# Altium PCB plp-cm_2a_assm.PcbDoc
Units mm, origin at the board's own origin, x right, y up, seen from the top; angles counter-clockwise.
Board outline 34 x 22 mm, 4 copper layers (Top Layer, Signal Layer 1, Signal Layer 2, Bottom Layer), stack 1.026 mm thick; 58 components, 45 nets, 205 pads, 63 vias.
Unrouted connection lines stored in the file: 34.
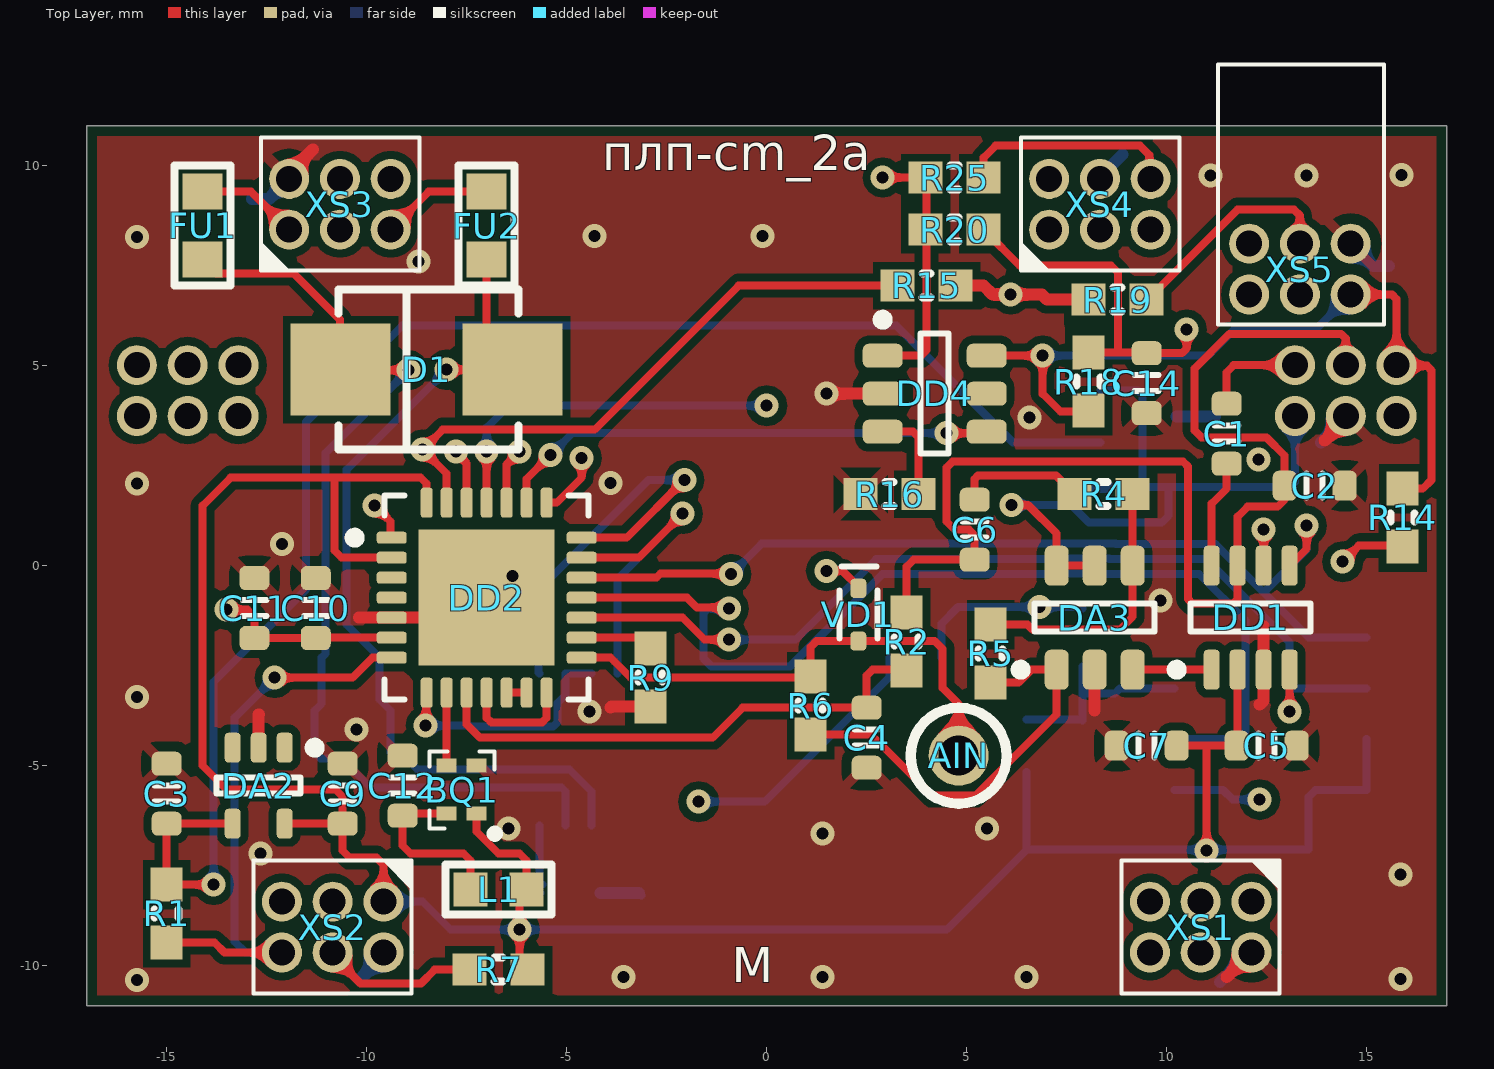
[diagram p0: Top Layer view]
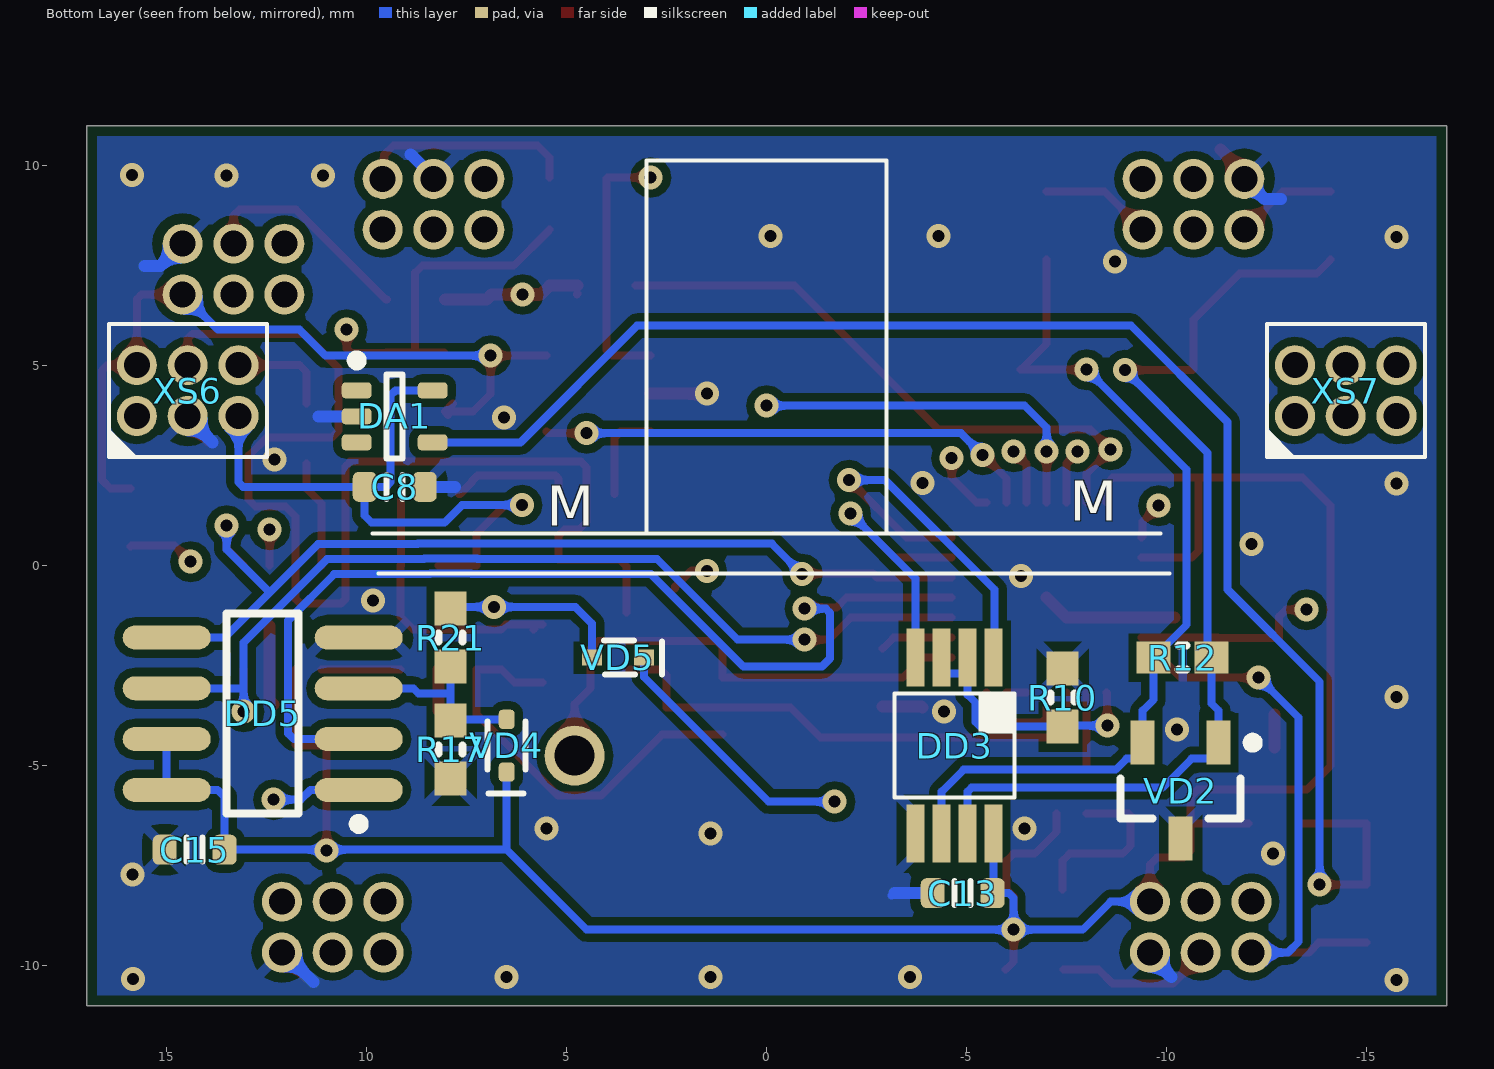
[diagram p1: Bottom Layer view, seen from below]
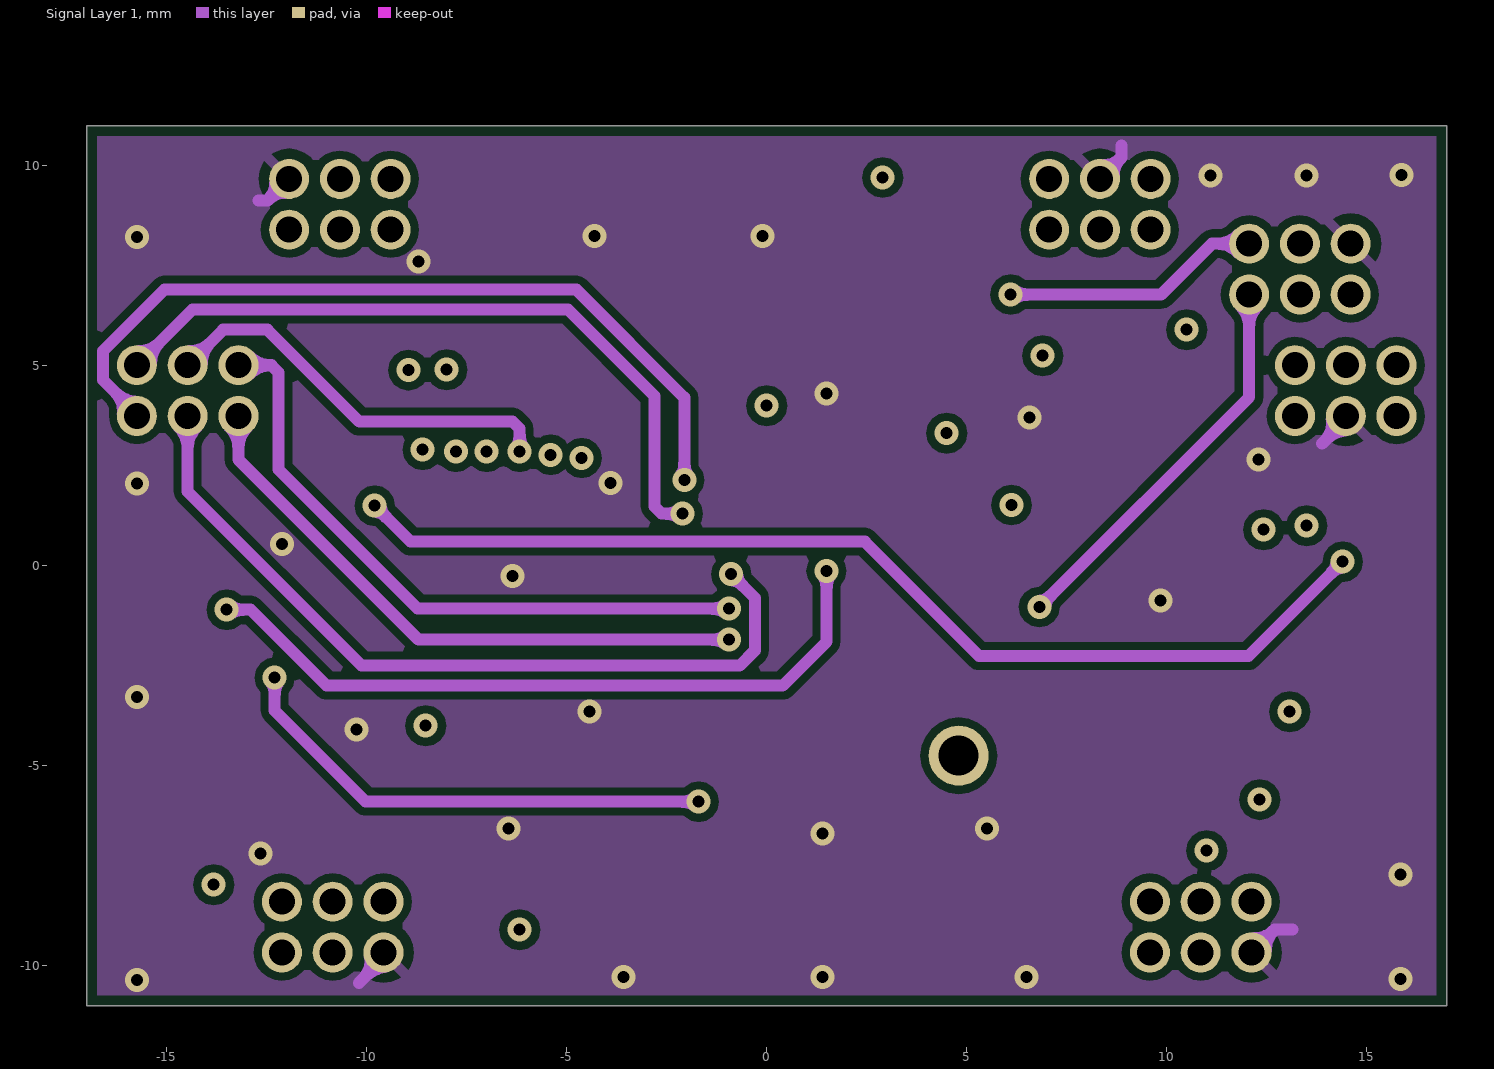
[diagram p2: Signal Layer 1]
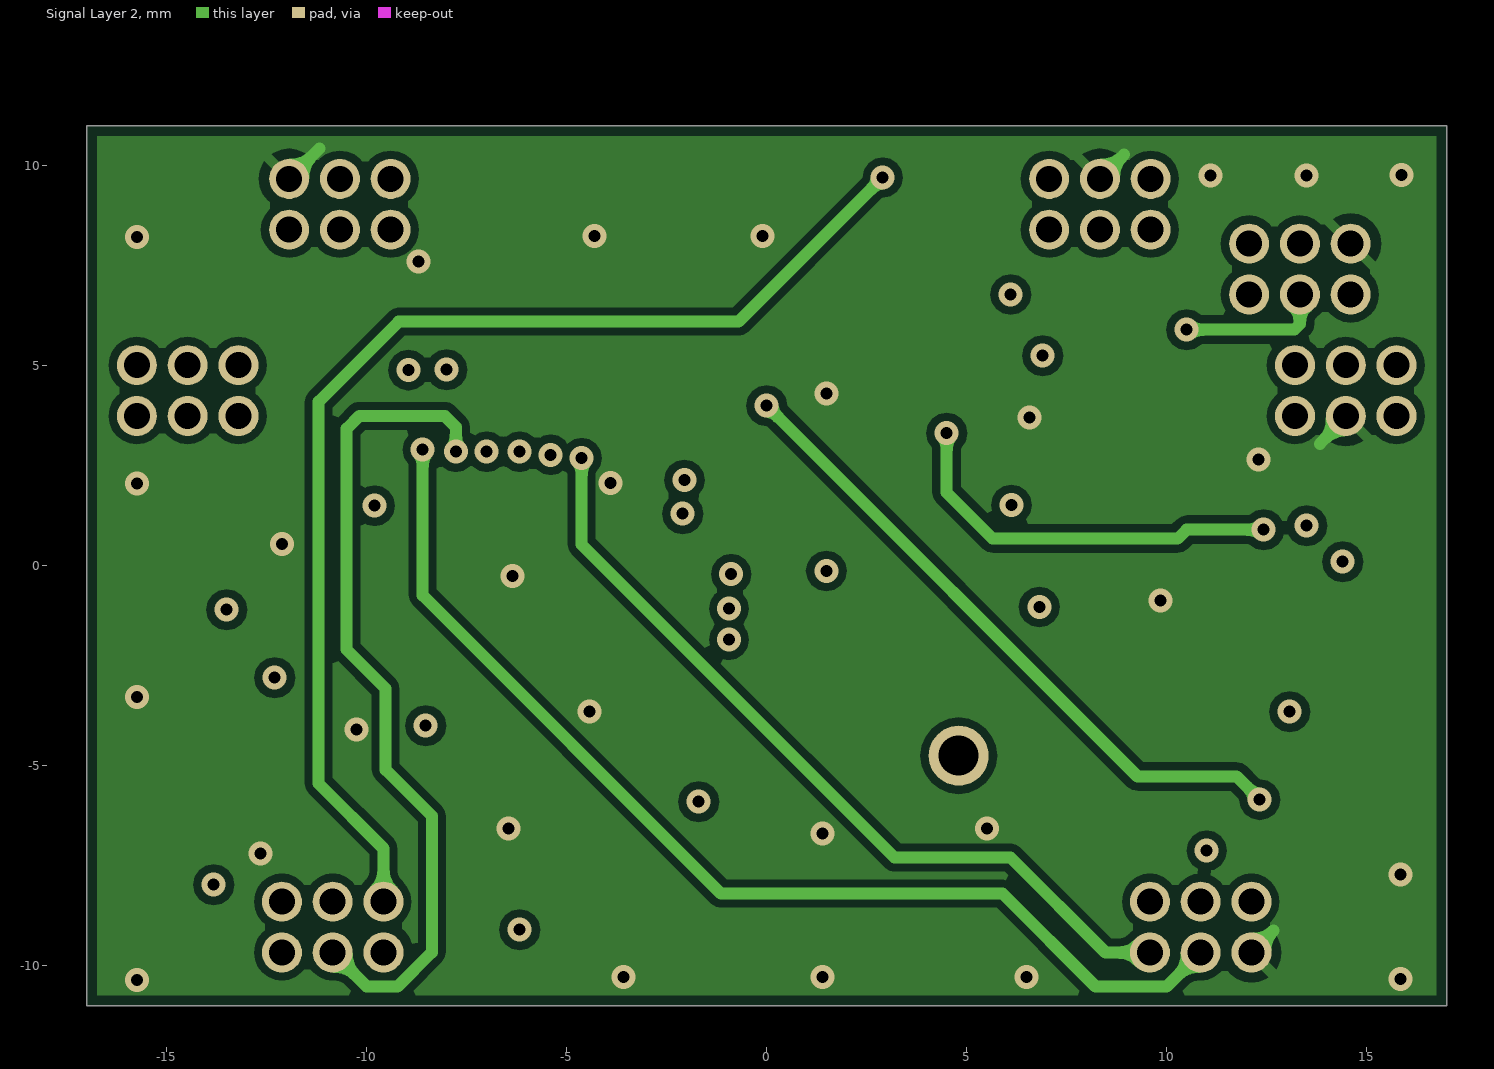
[diagram p3: Signal Layer 2]
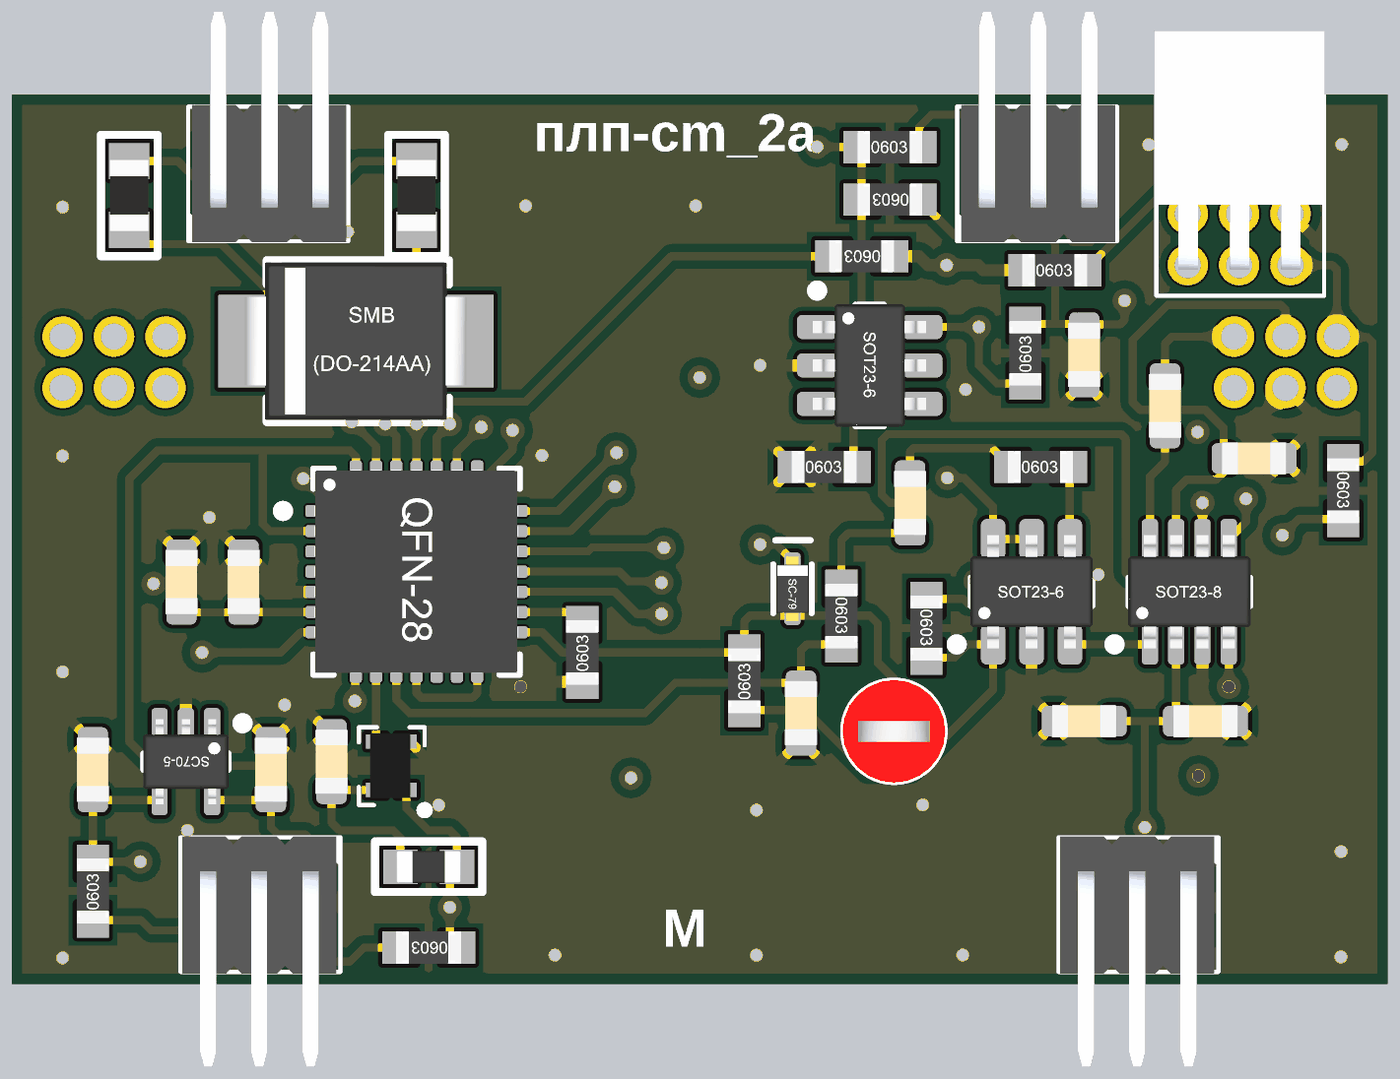
[diagram p4: 3D render of the assembled board from above, using the file's embedded part models]
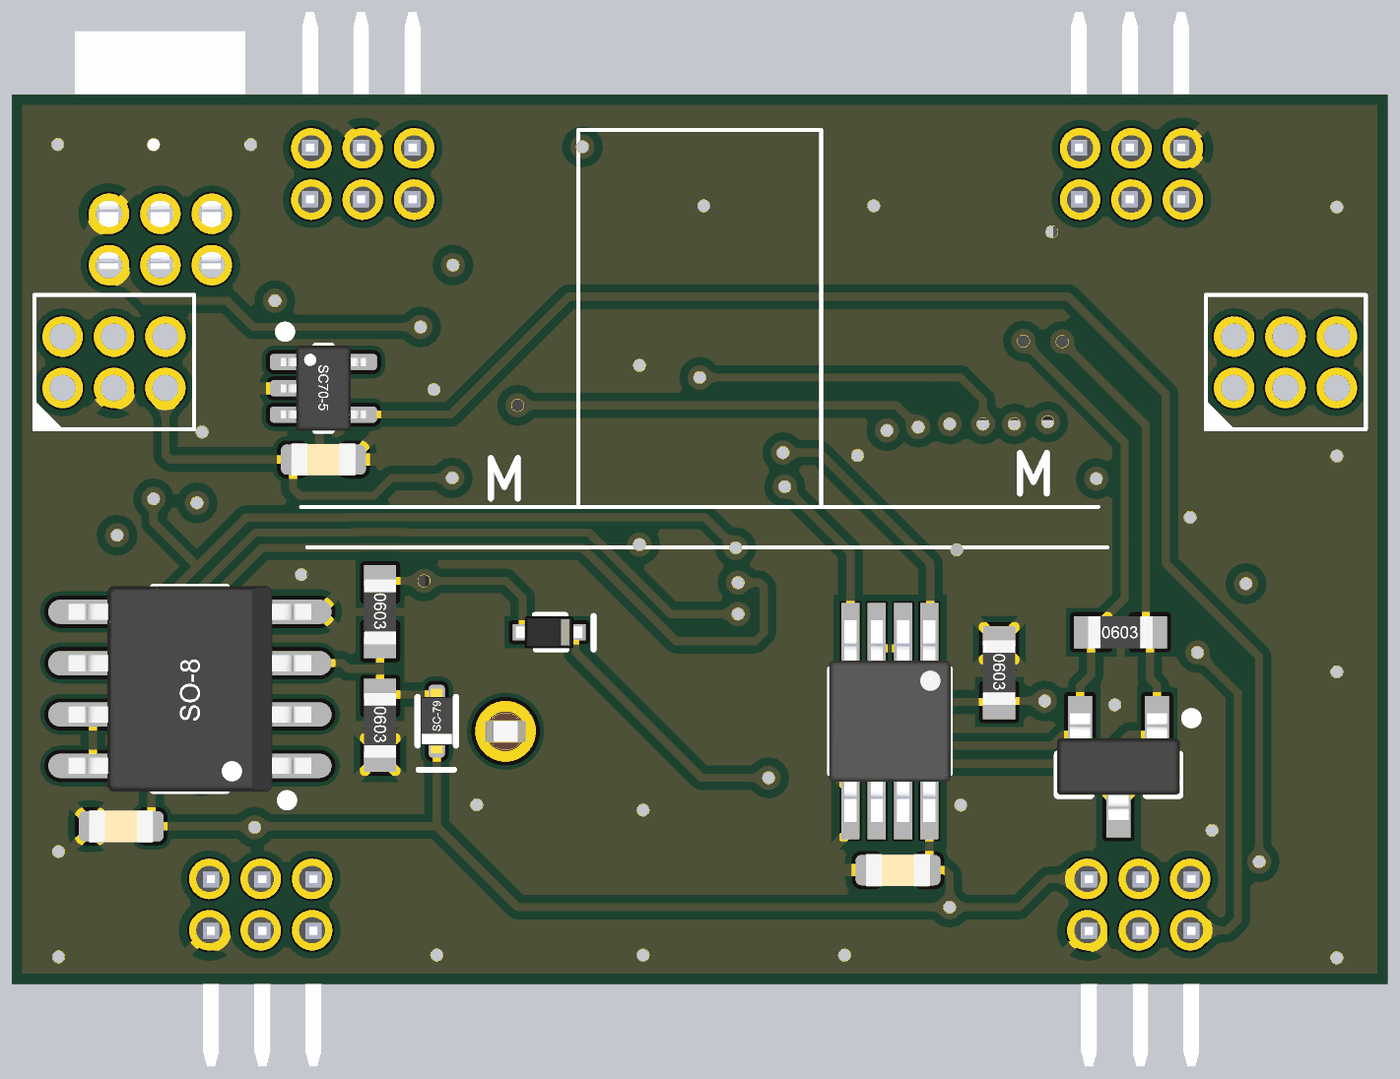
[diagram p5: 3D render of the assembled board from below, using the file's embedded part models]

## Layer stack, top to bottom
Top Solder: solder mask 0.0102, Solder Resist, Dk 3.5
Top Layer: signal copper 0.035
Dielectric1: core 0.3, FR-4, Dk 4.8
Signal Layer 1: signal copper 0.018
Dielectric 3: prepreg 0.32, Dk 4.2
Signal Layer 2: signal copper 0.018
Dielectric 2: core 0.3, Dk 4.2
Bottom Layer: signal copper 0.035
Bottom Solder: solder mask 0.0102, Solder Resist, Dk 3.5

## Board outline
-17,-9 -17,11 17,11 17,-11 -17,-11

## Design rules (kind name [scope] priority, off if disabled: settings)
AcuteAngle [All] p1: minimum=4.40000000000000E+0001 checktracksonly=FALSE
BoardOutlineClearance [All] p1: gap=0.254 ignorepadtopadclearanceinfootprint=FALSE
Clearance Clearance_Bound [Not (OnBottomLayer Or OnTopLayer or OnMultiLayer) vs OnLayer('Keep-Out Layer')] p1 off: gap=0.5 ignorepadtopadclearanceinfootprint=FALSE except(0: Arc-Hole Track-Hole SMDPad-Hole THPad-Hole Via-Hole Fill-Hole Poly-Hole Region-Hole Text-Hole)
Clearance Clearance_Bound_1 [(OnBottomLayer Or OnTopLayer or OnMultiLayer) vs OnLayer('Keep-Out Layer')] p2 off: gap=0.25 ignorepadtopadclearanceinfootprint=FALSE except(0: Arc-Hole Track-Hole SMDPad-Hole THPad-Hole Via-Hole Fill-Hole Poly-Hole Region-Hole Text-Hole)
Clearance Clearance_Poly [All vs InPolygon] p3: gap=0.2 ignorepadtopadclearanceinfootprint=FALSE except(0: Arc-Hole Track-Hole SMDPad-Hole THPad-Hole Via-Hole Fill-Hole Poly-Hole Region-Hole Text-Hole)
Clearance Clearance_in [(OnLayer('Signal Layer 1') OR OnLayer('Signal Layer 2'))] p4: gap=0.2 ignorepadtopadclearanceinfootprint=FALSE
Clearance Clearance_out [(OnLayer('Bottom Layer') OR OnLayer('Top Layer'))] p5: gap=0.125 ignorepadtopadclearanceinfootprint=FALSE
HoleSize [All] p1: absolutevalues=TRUE maxlimit=2.54 minlimit=0.3 maxpercent=80.000 minpercent=20.000
HoleToHoleClearance [All] p1: gap=0.425 allowstackedmicrovias=FALSE
MinimumAnnularRing [All] p1: minimumring=0.15
MinimumSolderMaskSliver [All] p1: minsoldermaskwidth=0
NetAntennae [All] p1: netantennaetolerance=5
PermittedLayers [All] p1: toplayerpermitted=TRUE bottomlayerpermitted=TRUE
PolygonConnect [All] p1: thpad.connectstyle=Relief thpad.reliefconductorwidth=0.254 thpad.reliefentries=2 thpad.polygonreliefangle="45 Angle" thpad.airgapwidth=0.254 smdpad.connectstyle=Relief smdpad.reliefconductorwidth=0.254 smdpad.reliefentries=4 smdpad.polygonreliefangle="45 Angle" smdpad.airgapwidth=0.254 via.connectstyle=Direct via.reliefconductorwidth=0.254 via.reliefentries=2 via.polygonreliefangle="45 Angle" via.airgapwidth=0.254
RoutingVias [All] p1: holewidth=0.3 width=0.8 viastyle="Through Hole" minholewidth=0.2 minwidth=0.6 maxholewidth=0.4 maxwidth=1.27
SMDNeckDown [All] p1: percent=100.000
SMDToCorner [All] p1: distance=39370
SMDToPlane [All] p1: distance=0
ShortCircuit [All] p1: allowed=TRUE
SilkToSilkClearance [All] p1: silktosilkclearance=0.15
SilkToSolderMaskClearance SilkscreenOverComponentPads [IsPad] p1: minsilkscreentomaskgap=0.15 clearancetoexposedcopper=TRUE
SolderMaskExpansion [All] p1: expansion=0.1 istentingtop=FALSE
ViasUnderSMD [All] p1: allowed=TRUE
Width [All] p1: maxlimit=3 minlimit=0.15 preferedwidth=0.25 midlayer1_minwidth=0.2 midlayer2_minwidth=0.2 minimp=50.000000 maximp=50.000000 favimp=50.000000
23 further rules are at their usual default settings.

## Components (designator, comment, footprint, x,y, rotation, side; value= is the part's Value field where it differs from the comment)
AIN "Testpoint_HS1mm" TestPoint(1mm_HS) 4.888,-4.836 r0 top
BQ1 "AMPMGFB-48.0000T" AMPMGFB(1.6x1.2) -7.25,-6.2 r90 top
C1 "Capacitor Ceramic" CAPC_0603(1608)X080L 11.5,3.3 r90 top value=120pF
C2 "Capacitor Ceramic" CAPC_0603(1608)X080L 13.7,2 r0 top value=4,7uF
C3 "Capacitor Ceramic" CAPC_0603(1608)X080L -15,-5.7 r270 top value=4.7uF
C4 "Capacitor Ceramic" CAPC_0603(1608)X080L 2.5,-4.3 r270 top value=4.7uF
C5 "Capacitor Ceramic" CAPC_0603(1608)X080L 12.5,-4.5 r180 top value=4.7uF
C6 "Capacitor Ceramic" CAPC_0603(1608)X080L 5.2,0.9 r270 top value=120pF
C7 "Capacitor Ceramic" CAPC_0603(1608)X080L 9.5,-4.5 r180 top value=0.1uF
C8 "Capacitor Ceramic" CAPC_0603(1608)X080L 9.3,1.971 r0 bottom value=4.7uF
C9 "Capacitor Ceramic" CAPC_0603(1608)X080L -10.6,-5.7 r270 top value=4.7uF
C10 "Capacitor Ceramic" CAPC_0603(1608)X080L -11.274,-1.058 r90 top value=4,7uF
C11 "Capacitor Ceramic" CAPC_0603(1608)X080L -12.809,-1.058 r90 top value=0.1uF
C12 "Capacitor Ceramic" CAPC_0603(1608)X080L -9.1,-5.5 r90 top value=0.1uF
C13 "Capacitor Ceramic" CAPC_0603(1608)X080L -4.9,-8.184 r180 bottom value=0.1uF
C14 "Capacitor Ceramic" CAPC_0603(1608)X080L 9.5,4.563 r270 top value=0.1uF
C15 "Capacitor Ceramic" CAPC_0603(1608)X080L 14.3,-7.1 r0 bottom value=0.1uF
D1 "SMBJ10CA-TR" "DIODE: SMB" -8.5,4.9 r180 top
DA1 "TPS71501" SC-70-5 9.3,3.734 r270 bottom
DA2 "TPS71501" SC-70-5 -12.7,-5.5 r180 top
DA3 "OPA363AIDBV" SOT23-6 7.25,0 r0 top
DD1 "AD5160BRJZ" SOT23-8 12.1,-1.3 r0 top
DD2 "C8051F411-GM" QFN-28 -7,-0.8 r270 top
DD3 "SN65HVD72DGK" VSSOP-8 -4.7,-4.5 r270 bottom
DD4 "TLP5010" SOT23-6 5.5,5.25 r270 top
DD5 "FM25CL64B-G" SO-8_N 12.6,-3.7 r0 bottom
FU1 "0zcm0002ff2g" "FUSE: 0603" -14.1,8.5 r90 top
FU2 "0zcm0002ff2g" "FUSE: 0603" -7,8.5 r90 top
L1 "BLM18AG102SN1D" "IND: 0603" -6.7,-8.1 r180 top
R1 "R0603L" RESC1608(0603)X04L -15,-8.7 r90 top value=100
R2 "R0603L" RESC1608(0603)X04L 3.5,-1.9 r270 top value=100
R4 "R0603L" RESC1608(0603)X04L 8.42,1.789 r0 top value=10k
R5 "R0603L" RESC1608(0603)X04L 5.6,-2.2 r270 top value=910k
R6 "R0603L" RESC1608(0603)X04L 1.1,-3.5 r90 top value=510
R7 "R0603L" RESC1608(0603)X04L -6.7,-10.1 r180 top value=2,4k
R9 "R0603L" RESC1608(0603)X04L -2.9,-2.8 r90 top value=5,96k
R10 "R0603L" RESC1608(0603)X04L -7.4,-3.3 r270 bottom value=10k
R12 "R0603L" RESC1608(0603)X04L -10.4,-2.3 r180 bottom value=120
R14 "R0603L" RESC1608(0603)X04L 15.9,1.2 r270 top value=100
R15 "R0603L" RESC1608(0603)X04L 4,7 r180 top value=100
R16 "R0603L" RESC1608(0603)X04L 3.075,1.789 r0 top value=30k
R17 "R0603L" RESC1608(0603)X04L 7.9,-4.6 r270 bottom value=10k
R18 "R0603L" RESC1608(0603)X04L 8.049,4.6 r90 top value=1k
R19 "R0603L" RESC1608(0603)X04L 8.774,6.653 r0 top value=1k
R20 "R0603L" RESC1608(0603)X04L 4.7,8.4 r180 top value=1k
R21 "R0603L" RESC1608(0603)X04L 7.9,-1.795 r270 bottom value=2,4k
R25 "R0603L" RESC1608(0603)X04L 4.7,9.7 r0 top value=510
VD1 "BAT54XV2" "SOD523 - ONs" 2.291,-1.225 r90 top
VD2 "SM712" SOT23 -10.35,-5.625 r270 bottom
VD4 "BAT54XV2" "SOD523 - ONs" 6.5,-4.5 r270 bottom
VD5 "Schottky diode, 80V, 500mA, 1V, 15pF, SOD-123, -55...+150°C" "DIODE: SOD523" 4.373,-2.3 r180 bottom
XS1 "2199R05-06G-301523" "CON: PLL-6(2x3R1.27male)" 12.12,-8.4 r180 top locked
XS2 "2199R05-06G-301523" "CON: PLL-6(2x3R1.27male)" -9.58,-8.4 r180 top locked
XS3 "2199R05-06G-301523" "CON: PLL-6(2x3R1.27male)" -11.94,8.4 r0 top locked
XS4 "2199R05-06G-301523" "CON: PLL-6(2x3R1.27male)" 7.06,8.4 r0 top locked
XS5 "PBD 1.27-6R" "CON: PLLD-6R(1.27)" 12.06,6.775 r0 top locked
XS6 "2199R05-06G-301523" "CON: PLL-6(2x3R1.27female)" 16.5,2.7 r180 bottom locked
XS7 "2199R05-06G-301523" "CON: PLL-6(2x3R1.27female)" -12.452,2.7 r180 bottom locked

## Footprints (in the part's own frame and the unit in brackets; to place one, negate y for a bottom-side part, rotate by r counter-clockwise, add the part's x,y. Pads: shape width x height; smd on the part's side, far side on the other; paste and mask are expansions set on the pad)
AMPMGFB(1.6x1.2) [mm]
  rect 0.35x0.5 smd: 1(0,0) 2(1.2,0) 3(1.2,0.75) 4(0,0.75)
  silkscreen extent -0.57,-0.8 1.55,1.17, body extent -0.2,-0.1 1.4,0.9, height 0.5
CAPC_0603(1608)X080L [mm] "Chip Capacitor, 2-Leads, Body 1,6x0,8mm, IPC High Density"
  rrect50% 0.6x0.75 smd: 1(-0.75,0) 2(0.75,0)
  silkscreen extent -0.2,-0.3 0.2,0.3, body extent -0.8,-0.4 0.8,0.4, height 0.8
"CON: PLL-6(2x3R1.27female)" [mm]
  round 1 hole 0.65 mask+0.05: 1(0.754,1.042) 2(0.754,2.312) 3(2.024,1.042) 4(2.024,2.312) 5(3.294,1.042) 6(3.294,2.312)
  silkscreen extent 0.05,0.02 4.01,3.34
"CON: PLL-6(2x3R1.27male)" [mm]
  round 1 hole 0.65 mask+0.05: 1(0,0) 2(0,1.27) 3(1.27,0) 4(1.27,1.27) 5(2.54,0) 6(2.54,1.27)
  silkscreen extent -0.7,-1.02 3.25,2.3, body extent -0.6,-1.05 3.21,4.65, height 4.39
"CON: PLLD-6R(1.27)" [mm]
  round 1 hole 0.65 mask+0.05: 1(0,0.005) 2(0,1.275) 3(1.27,0.005) 4(1.27,1.275) 5(2.54,0.005) 6(2.54,1.275)
  silkscreen extent -1.5,-0.75 3.37,5.75, body extent -0.83,-0.1 3.38,5.8, height 3
"DIODE: SMB" [mm]
  rect 2.5x2.3 smd: 1(-2.15,0) 2(2.15,0)
  silkscreen extent -2.3,-2 2.2,2, body extent -2.75,-1.95 2.75,1.95, height 2.45
"DIODE: SOD523" [mm]
  rect 0.5x0.4 smd: 1(0,0) 2(1.3,0)
  silkscreen extent 0.3,-0.43 1.75,0.43, body extent -0.17,-0.4 1.48,0.4, height 0.65
"FUSE: 0603" [mm]
  rect 0.9x1 smd: 1(-0.85,0) 2(0.85,0)
  Top Layer pour cut-out: -0.6,0.5 -0.4,0.7 0.4,0.7 0.6,0.5 0.6,-0.5 0.4,-0.7 -0.4,-0.7 -0.6,-0.5
  silkscreen extent -1.5,-0.7 1.5,0.7, body extent -0.87,-0.47 0.88,0.48, height 0.54
"IND: 0603" [mm]
  rect 0.85x0.85 smd: 1(-0.7,0) 2(0.7,0)
  silkscreen extent -1.33,-0.63 1.33,0.63, body extent -0.8,-0.4 0.8,0.4, height 0.8
QFN-28 [mm] "QFN, 28-Leads, Body 5,1x5,1mm (max), Pitch 0,50mm, IPC High Density"
  rrect50% 0.3x0.75 smd mask+0.05: 1(-1.5,-2.375) 2(-1,-2.375) 3(-0.5,-2.375) 4(0,-2.375) 5(0.5,-2.375) 6(1,-2.375) 7(1.5,-2.375) 15(1.5,2.375) 16(1,2.375) 17(0.5,2.375) 18(0,2.375) 19(-0.5,2.375) 20(-1,2.375) 21(-1.5,2.375)
  rrect50% 0.75x0.3 smd mask+0.05: 8(2.375,-1.5) 9(2.375,-1) 10(2.375,-0.5) 11(2.375,0) 12(2.375,0.5) 13(2.375,1) 14(2.375,1.5) 22(-2.375,1.5) 23(-2.375,1) 24(-2.375,0.5) 25(-2.375,0) 26(-2.375,-0.5) 27(-2.375,-1) 28(-2.375,-1.5)
  rect 3.4x3.4 smd: 29(0,0)
  silkscreen extent -2.55,-3.42 2.55,2.55, body extent -2.52,-2.53 2.52,2.51, height 1
RESC1608(0603)X04L [mm] "Chip Resistor, 2-Leads, Body 1,6x0,8mm, IPC High Density"
  rect 0.85x0.8 smd: 1(-0.725,0) 2(0.725,0)
  silkscreen extent -0.1,-0.3 0.1,0.3, body extent -0.8,-0.4 0.8,0.4, height 0.45
SC-70-5 [mm] "SC-70, 5-Leads, Body 2,1x1,4mm (max), Pitch 0,65mm, IPC High Density"
  rrect50% 0.4x0.75 smd: 1(-0.65,-0.95) 2(0,-0.95) 3(0.65,-0.95) 4(0.65,0.95) 5(-0.65,0.95)
  silkscreen extent -1.52,-1.08 1.05,0.2, body extent -1.05,-1.05 1.05,1.05, height 1.1
SO-8_N [mm] "8-Pin Small Outline Integrated Circuit 1.27 mm Pitch, IPC Medium Density"
  oval 2.2x0.6 smd: 1(-2.4,1.905) 2(-2.4,0.635) 3(-2.4,-0.635) 4(-2.4,-1.905) 5(2.4,-1.905) 6(2.4,-0.635) 7(2.4,0.635) 8(2.4,1.905)
  silkscreen extent -2.52,-2.5 0.9,2.88, body extent -3,-2.54 3,2.54, height 1.7
"SOD523 - ONs" [mm] "SC-79 Molded Diode, 2-Leads, Body 1,2x0,8mm, IPC High Density"
  rrect50% 0.48x0.4 smd: 1(-0.66,0) 2(0.66,0)
  silkscreen extent -0.6,-0.48 1.2,0.48, body extent -0.8,-0.4 0.8,0.4, height 0.62
SOT23 [mm]
  rect 1.1x0.6 smd: 1(-1.2,0.95) 2(-1.2,-0.95) 3(1.2,0)
  silkscreen extent -1.32,-1.5 0.7,1.92, body extent -1.32,-1.52 1.32,1.52, height 1.12
SOT23-6 [mm] "SOT23, 6-Leads, Body 3,0x3,0mm (max), Pitch 0,95mm, IPC High Density"
  rrect50% 0.6x1 smd: 1(0,-2.6) 2(0.95,-2.6) 3(1.9,-2.6) 4(1.9,0) 5(0.95,0) 6(0,0)
  silkscreen extent -1.02,-2.72 2.45,-0.95, body extent -0.56,-2.7 2.46,0.1, height 1.25
SOT23-8 [mm] "SOT23, 8-Leads, Body 3,0x3,0mm (max), Pitch 0,65mm, IPC High Density"
  rrect50% 0.4x1 smd: 1(-0.975,-1.3) 2(-0.325,-1.3) 3(0.325,-1.3) 4(0.975,-1.3) 5(0.975,1.3) 6(0.325,1.3) 7(-0.325,1.3) 8(-0.975,1.3)
  silkscreen extent -1.97,-1.42 1.5,0.35, body extent -1.51,-1.4 1.51,1.4, height 1.25
TestPoint(1mm_HS) [mm]
  round 1.5 hole 1: 1(-0.088,0.086)
  silkscreen extent -1.29,-1.11 1.11,1.29, body extent -1.36,-1.18 1.18,1.36, height 4.57
VSSOP-8 [mm]
  rect 1.45x0.45 smd mask+0.05: 1(-2.2,0.975) 2(-2.2,0.325) 3(-2.2,-0.325) 4(-2.2,-0.975) 5(2.2,-0.975) 6(2.2,-0.325) 7(2.2,0.325) 8(2.2,0.975)
  silkscreen extent -1.3,-1.5 1.3,1.5, body extent -2.5,-1.5 2.5,1.5, height 1.1

## Part data
C1 C6: "Конденсатор", Case=0603, Manufacturer=Murata, Rated DC Voltage=50V, ReplacementPart1Manufacturer=TDK, ReplacementPart2Manufacturer="Taiyo Yuden", Temperature Range="-55 to +125°C", Tolerance=±5%, ComponentLink1Description="Global Data", ComponentLink1URL=http://www.murata.com/products/capacitor/tech_data/index.html, ComponentLink2Description="Part Data Sheet", ComponentLink3Description="Replacement Data Sheet", ComponentLink4Description="Replacement 2 Data Sheet", ESR="* mOhm", OrderCode="0603 - 120пФ ±5% 50В - NPO", TC Code=X7R
C2 C4: "Конденсатор", Case=0603, Manufacturer=Murata, Rated DC Voltage=16V, ReplacementPart1Manufacturer=TDK, ReplacementPart2Manufacturer="Taiyo Yuden", Temperature Range="-55 to +125°C", Tolerance=±10%, ComponentLink1Description="Global Data", ComponentLink1URL=http://www.murata.com/products/capacitor/tech_data/index.html, ComponentLink2Description="Part Data Sheet", ComponentLink3Description="Replacement Data Sheet", ComponentLink4Description="Replacement 2 Data Sheet", ESR="* mOhm"
  C2: OrderCode="0603 - 10мкФ ±10% - 6.3В - X5R", TC Code=X5R
  C4: OrderCode="0603 - 0,1мкФ ±10% - 50В - X7R", TC Code=X7R
C3 C5 C8 C9: "Конденсатор", Case=0603, Manufacturer=Murata, Rated DC Voltage=10V, ReplacementPart1Manufacturer=TDK, ReplacementPart2Manufacturer="Taiyo Yuden", Temperature Range="-55 to +125°C", Tolerance=±10%, ComponentLink1Description="Global Data", ComponentLink1URL=http://www.murata.com/products/capacitor/tech_data/index.html, ComponentLink2Description="Part Data Sheet", ComponentLink3Description="Replacement Data Sheet", ComponentLink4Description="Replacement 2 Data Sheet", ESR="* mOhm", OrderCode="0603 - 4,7мкФ ±10% - 10В - X5R", TC Code=X5R
C7 C11 C12 C13 C14 C15: "Конденсатор", Case=0603, Manufacturer=Murata, Rated DC Voltage=50V, ReplacementPart1Manufacturer=TDK, ReplacementPart2Manufacturer="Taiyo Yuden", Temperature Range="-55 to +125°C", Tolerance=±10%, ComponentLink1Description="Global Data", ComponentLink1URL=http://www.murata.com/products/capacitor/tech_data/index.html, ComponentLink2Description="Part Data Sheet", ComponentLink3Description="Replacement Data Sheet", ComponentLink4Description="Replacement 2 Data Sheet", ESR="* mOhm", OrderCode="0603 - 0,1мкФ ±10% - 50В - X7R", TC Code=X7R
C10: "Конденсатор", Case=0603, Manufacturer=Murata, Rated DC Voltage=16V, ReplacementPart1Manufacturer=TDK, ReplacementPart2Manufacturer="Taiyo Yuden", Temperature Range="-55 to +125°C", Tolerance=±5%, ComponentLink1Description="Global Data", ComponentLink1URL=http://www.murata.com/products/capacitor/tech_data/index.html, ComponentLink2Description="Part Data Sheet", ComponentLink3Description="Replacement Data Sheet", ComponentLink4Description="Replacement 2 Data Sheet", ESR="* mOhm", OrderCode="0603 - 56пФ ±10% - 50В - NPO", TC Code=NPO
DA1 DA2: "Микросхема", Manufacturer="Texas Instruments", ComponentLink1Description="Data Sheet"
DA3: "1.8V, 7MHz, 90dB CMRR,  Single-Supply, Rail-to-Rail I/O Operational Amplifier"
DD1: library part AD5160, "Микросхема", Manufacturer="Analog Devices", PartNumber=AD5160BRJZ
DD2: "50MIPS 32kB Flash 2k RAM 8-Bit Microcontroller", Manufacturer=Silabs, ComponentLink1Description="Data Sheet", ComponentLink2Description="Replacement 1 Data Sheet", ComponentLink3Description="Replacement 2 Data Sheet", PartNumber=C8051F411-GM
DD3: "RS-485/422", ComponentLink1Description=Datasheet, ComponentLink1URL=https://www.ti.com/lit/ds/symlink/sn65hvd72.pdf?ts=1607084930164&ref_url=https%253A%252F%252Fwww.ti.com%252Fstore%252Fti%252Fen%252Fp%252Fproduct%252F%253Fp%253DSN65HVD72DRBT
DD5: "Микросхема", ReplacementPart1Manufacturer=ISSI, ReplacementPart1PartNumber=IS25C08-2ZLI-TR, ComponentLink1Description="Manufacturer Link", ComponentLink1URL=http://www.microchip.com, ComponentLink2Description=Datasheet, ComponentLink3Description="Packaging Specification", Manufacturer=FM25CL64B-G, PartNumber=FM25CL64B-G
FU1 FU2: library part FUSE:0603
L1: "100MHz 1K"
R1 R2 R4 R5 R6 R7 R9 R10 R12 R14 R15 R16 R17 R18 R19 R20 R21 R25: "Резистор", Case=0603, Manufacturer=Bourns, Max Rated DC Voltage="100 В", Power="1/10 Вт", Rated DC Voltage="50 В", Resistance Code="0603 {Value} Ом ±1 %", Temperature Range="-55 to +125°C", Tolerance="±1 %", ComponentLink1Description="Data Sheet", ComponentLink1URL=http://smd.ru/files/upload/1207/ru/chip-resis.pdf, ComponentLink2Description="Specific Res Only", ComponentLink3Description="Replacement Data Sheet", ComponentLink4Description="Replacement 2 Data Sheet", Rated T="-55 °C to +125 °C", TKR="±100 ppm"
VD1 VD4: "shottky diode", Manufacturer="ON Semiconductor", ComponentLink1Description="Data Sheet", ComponentLink2Description="Replacement 1 Data Sheet", ComponentLink3Description="Replacement 2 Data Sheet"
VD2: "EIA RS-485 ±7V"
VD5: library part Schottky_single, Current=500mA, Manufacturer="Diodes Incorporated", Package=SOD-123, PartNumber=MBR0580S1-7, Temperature=-55...+150°C, Voltage=80V, VoltageDrop=1V, HelpURL=https://www.digikey.com/product-detail/en/diodes-incorporated/MBR0580S1-7/MBR0580S1-7DICT-ND/5080371, RecoveryTime=15pF, TypeDiode="Schottky diode", ValueManufacturerPartNumber="Schottky diode, 80V, 500mA, 1V, 15pF, SOD-123, -55...+150°C"
XS1 XS2 XS3 XS4: library part 2199R05-06G-301523Out, "Step 1.27 R"
XS6 XS7: library part 2199R05-06G-301523In, "Step 1.27"

## Via types
v1: diameter 0.6, hole 0.3, Top Layer to Bottom Layer, tented both sides, 63 vias

## Nets (pads, with @x,y where several pads share a name; then routed paths per layer and width w, separated by ;. In a path a pad name is that pad's centre, name@x,y a point inside that pad or via, vN(x,y) a via of type N, cw(c..) or ccw(c..) an arc to the next point about the centre after c; other vN are vias at no path point)
+3: C8.2 DA1.5 DA3.5 DA3.6 XS6.5 | length 16.9
  Top Layer w0.2: v1(6.117,1.517) 6.535,1.517 7.25,0.802 DA3.6 DA3.5
  Bottom Layer w0.2: v1(6.117,1.517) 7.613,1.517 8.055,1.075 9.874,1.075 10.05,1.251 C8.2 ; DA1.5 9.283,4.384 9.4,4.267 9.4,2.088 9.517,1.971 C8.2 ; XS6.5 13.206,2.088 13.089,1.971 C8.2
+3.3: BQ1.1 C5.2 C7.1 C9.2 C13.2 C15.1 DA2.5 DD1.2 DD2.2 DD2.28 DD3.8 DD4.1 DD5.7 DD5.8 L1.1 R7.1 R20.2 R25.1 VD4.2 XS2.1 | length 105.2
  Top Layer w0.2: DA2.5 C9.2 ; XS2.1 -9.58,-7.476 -9.756,-7.3 -10.424,-7.3 -10.6,-7.124 C9.2 ; DD2.2 -10.624,0.2 -10.8,0.376 -10.8,2.2 ; DD2.28 -8.5,2.05 -8.65,2.2 -10.8,2.2 ; BQ1.1 -7.25,-6.65 -6.7,-7.2 -6.176,-7.2 -6,-7.376 L1.1 -6.176,-8.276 v1(-6.176,-9.1) -6.176,-9.899 R7.1 ; DD4.1 3.854,5.25 4,5.396 4,9.675 R25.1 3.97,9.705 v1(2.9,9.705) ; C7.1 11,-4.5 ; v1(11,-7.124) 11,-4.5 ; DD1.2 11.775,-4.475 C5.2 11,-4.5 ; -10.8,2.2 -13.4,2.2 -14.1,1.5 -14.1,-5 -13.5,-5.6 -10.776,-5.6 -10.6,-5.776 C9.2
  Signal Layer 2 w0.3: XS2.1 -9.58,-7.07 -11.2,-5.45 -11.2,4.1 -9.2,6.1 -0.705,6.1 v1(2.9,9.705)
  Bottom Layer w0.2: XS2.1 -8.6,-8.4 -7.9,-9.1 v1(-6.176,-9.1) ; DD3.8@-5.675,-6.5 -5.675,-7.909 C13.2@-5.609,-7.975 ; C13.2 -6.05,-8.184 -6.176,-8.309 v1(-6.176,-9.1) ; VD4.2 6.5,-7.1 ; DD5.7 DD5.8 13.726,-5.605 13.55,-5.781 C15.1 11,-7.1 6.5,-7.1 ; v1(-6.176,-9.1) 4.5,-9.1 6.5,-7.1
+5: DD2.7 R1.1 VD5.2 XS2.6 | length 33.3
  Top Layer w0.2: R1.1 -13.8,-9.425 -13.555,-9.67 XS2.6 ; v1(-12.3,-2.8) -10.356,-2.8 -9.856,-2.3 DD2.7
  Signal Layer 1 w0.3: v1(-12.3,-2.8) -12.3,-3.625 -10.025,-5.9 v1(-1.7,-5.9)
  Bottom Layer w0.2: v1(-12.3,-2.8) -13.3,-3.8 -13.3,-9.4 -13.03,-9.67 XS2.6 ; v1(-1.7,-5.9) -0.05,-5.9 3.073,-2.777 VD5.2
A: FU2.2 XS3.5 | length 2.8
  Top Layer w0.2: XS3.5 -8.45,9.35 FU2.2
AIN: AIN.1 DD2.15 R6.2 VD1.1 | length 12.9
  Top Layer w0.2: DD2.15 -3.9,-2.3 -3.801,-2.399 -3.4,-2.8 R6.2@1.1,-2.8 ; R6.2 1.1,-2.031 1.246,-1.885 VD1.1 4.2,-1.885 4.4,-2.085 4.4,-3.054 4.8,-3.454 AIN.1
B: FU1.2 XS3.1 | length 2.6
  Top Layer w0.2: FU1.2 -12.89,9.35 XS3.1
C2CK: DD4.6 R14.1 R18.1 XS5.5 XS6.2 | length 19.7
  Top Layer w0.2: DD4.6 v1(6.9,5.25) 6.9,4.299 7.349,3.85 R18.1@8.049,3.85 ; R18.1@7.844,4.055 R18.1@8.049,3.85 ; R18.1@7.97,3.771 R18.1@8.049,3.85 ; XS5.5 15.629,6.78 15.746,6.663 XS6.2 15.759,5 16.504,5 16.621,4.883 16.621,2.146 16.4,1.925 R14.1
  Bottom Layer w0.2: v1(6.9,5.25) 11.03,5.25 11.68,5.9 13.72,5.9 XS5.5
C2D: R15.1 R19.1 XS5.2 | length 10
  Top Layer w0.2: R15.1@4.725,6.8 R15.1@4.745,6.78
  Top Layer w0.3: R15.1 5.425,7 5.645,6.78 6.88,6.78 7.007,6.653 R19.1
  Signal Layer 1 w0.3: v1(6.1,6.78) 9.861,6.78 11.131,8.05 XS5.2
C2D_sense: R19.2 XS5.4 | length 5.5
  Top Layer w0.2: R19.2 9.524,6.653 11.771,8.9 13.184,8.9 13.33,8.754 XS5.4
CLK: BQ1.3 DD2.9 | length 1.8
  Top Layer w0.2: BQ1.3 DD2.9
CMP0: DD2.11 DD2.14 | length 2.8
  Top Layer w0.2: DD2.11 -7,-3.801 -6.883,-3.918 -5.617,-3.918 -5.5,-3.801 DD2.14
CMP1: DD2.12 DD2.13 | length 0.5
  Top Layer w0.2: DD2.12 DD2.13
CS0: DD1.6 DD2.23 DD4.4 | length 23.5
  Top Layer w0.2: DD2.23 -6,2.172 v1(-5.4,2.772) ; v1(4.5,3.312) 5.462,3.312 DD4.4 ; DD1.6 v1(12.425,0.9)
  Signal Layer 2 w0.3: v1(4.5,3.312) 4.5,1.825 5.65,0.675 10.275,0.675 10.5,0.9 v1(12.425,0.9)
  Bottom Layer w0.2: v1(-5.4,2.772) -4.86,3.312 v1(4.5,3.312)
CS1: DD2.24 XS7.4 | length 11.7
  Top Layer w0.2: DD2.24 -6.5,2.526 v1(-6.176,2.85)
  Signal Layer 1 w0.3: XS7.4 -13.588,5.9 -12.484,5.9 -10.184,3.6 -6.351,3.6 -6.176,3.424 v1(-6.176,2.85)
CS2: DD2.25 DD5.1 | length 27.7
  Top Layer w0.2: DD2.25 v1(-7,2.85)
  Signal Layer 2 w0.3: v1(0,4) 9.27,-5.27 11.748,-5.27 v1(12.325,-5.848)
  Bottom Layer w0.2: v1(-7,2.85) -7,3.45 -6.45,4 v1(0,4) ; DD5.1 11.406,-5.605 11.649,-5.848 v1(12.325,-5.848)
DE: DD2.8 DD3.2 DD3.3 R10.2 | length 6.1
  Top Layer w0.2: v1(-8.525,-4) -8.513,-3.988 -8.513,-3.188 DD2.8
  Bottom Layer w0.2: v1(-8.525,-4) -7.425,-4 R10.2 -5.342,-4.025 -5.225,-3.908 -5.225,-3.428 -5.025,-3.228 -5.025,-2.7 DD3.3@-4.375,-2.7
GND: BQ1.2 C2.2 C3.1 C4.2 C5.1 C7.2 C8.1 C9.1 C10.2 C11.2 C12.2 C13.1 C14.2 C15.2 DA1.2 DA2.2 DA3.2 DD1.3 DD2.5 DD2.29 DD3.5 DD4.2 DD5.4 R9.1 R10.1 R16.1 R17.2 VD2.3 XS1.2 XS2.2 XS3.2 XS4.4 XS5.6 XS6.3 | length 29.8
  Top Layer w0.3: DA2.2 -12.7,-3.722 -12.692,-3.714 ; XS3.2 -11.94,9.814 -11.349,10.405 ; -10.191,-1.3 DD2.5 -7.5,-1.3 DD2.29 ; -3.9,-3.55 -3.875,-3.525 R9.1 ; v1@1.758,4.299 1.76,4.3 DD4.2 ; 8.2,-3.624 DA3.2 ; 11.5,-10.281 12.111,-9.67 XS1.2 ; 12.325,-3.475 12.425,-3.375 DD1.3 12.425,-1.505 ; 13.949,3.127 14.476,3.653 XS6.3
  Signal Layer 1 w0.3: -12.7,9.132 -12.478,9.132 XS3.2 ; -10.197,-10.431 -9.58,-9.814 XS2.2 ; XS4.4 8.868,10.208 8.868,10.5 ; XS1.2@12.084,-9.67 XS1.2 12.69,-9.1 13.14,-9.1 ; 13.882,3.052 14.476,3.646 XS6.3
  Signal Layer 2 w0.3: XS3.2 -11.184,10.426 ; XS4.4 8.937,10.277 ; XS1.2 12.668,-9.122 ; 13.829,3.049 14.476,3.696 XS6.3
  Bottom Layer w0.2: -3.191,-8.184 -3.125,-8.25
  Bottom Layer w0.3: -12.862,9.171 -12.439,9.171 XS3.2 ; -10.116,-10.286 -9.58,-9.749 XS2.2 ; C13.1 -3.191,-8.184 ; 7.792,1.971 C8.1 ; XS4.4 8.33,9.716 8.9,10.286 ; DA1.2 11.203,3.734 ; 11.334,-10.405 12.068,-9.67 XS1.2 ; 13.856,3.082 14.476,3.703 XS6.3 ; XS5.6 15.158,7.492 15.554,7.492
  other v1: -15.746,-10.352 15.845,-10.329 -3.578,-10.286 1.4,-10.286 6.5,-10.281 15.85,-7.725 -12.66,-7.2 1.4,-6.7 -6.45,-6.575 5.511,-6.571 -10.26,-4.097 -4.427,-3.65 -15.746,-3.28 9.848,-0.875 -6.351,-0.26 -12.12,0.541 -15.746,2.061 -3.9,2.072 12.3,2.652 6.571,3.703 1.491,4.3 -8.702,7.604 -15.746,8.217 -4.3,8.247 -0.1,8.247 11.096,9.76 13.5,9.76 15.867,9.764
IN: C1.2 XS6.6 | length 2.6
  Top Layer w0.2: C1.2 11.5,4.837 11.676,5.012 XS6.6
MISO: DD2.18 DD5.2 XS7.2 | length 41.5
  Top Layer w0.2: DD2.18 -1.99,-0.8 -1.748,-1.042 -0.978,-1.042 v1(-0.945,-1.074)
  Signal Layer 1 w0.3: XS7.2 -12.384,5.012 -12.2,4.828 -12.2,2.4 -8.726,-1.074 v1(-0.945,-1.074)
  Bottom Layer w0.2: v1(-0.945,-1.074) -1.478,-1.074 -1.583,-1.179 -1.583,-2.317 -1.38,-2.52 0.585,-2.52 2.893,-0.212 7.384,-0.212 7.396,-0.2 8.404,-0.2 8.416,-0.212 10.812,-0.212 11.97,-1.37 11.97,-4.189 11.824,-4.335 DD5.2
MOSI: DD1.5 DD2.19 DD5.5 XS7.3 | length 44.4
  Top Layer w0.2: DD2.19 -2.76,-0.3 -2.66,-0.2 -0.9,-0.2 v1(-0.888,-0.212) ; DD1.5 13.5,0.425 v1(13.5,1)
  Signal Layer 1 w0.3: XS7.3 -14.476,1.851 -10.125,-2.5 -0.676,-2.5 -0.295,-2.119 -0.295,-0.805 v1(-0.888,-0.212)
  Bottom Layer w0.2: v1(-0.888,-0.212) -0.126,0.55 8.714,0.55 8.727,0.538 11.217,0.538 12.425,-0.67 ; v1(13.5,1) 13.5,0.405 12.425,-0.67 ; DD5.5 13.55,-1.795 12.425,-0.67
NetBQ1_4: BQ1.4 C12.1 L1.2 | length 4.5
  Top Layer w0.2: BQ1.4 -9.05,-6.2 C12.1 -9.1,-7 -8.9,-7.2 -7.576,-7.2 -7.4,-7.376 L1.2
NetC1_1: C1.1 DD1.8 | length 2.7
  Top Layer w0.2: DD1.8 11.125,1.551 11.5,1.926 C1.1
NetC3_2: C3.2 DA1.4 DA2.4 R1.2 | length 38.9
  Top Layer w0.2: v1(-13.825,-7.975) R1.2 C3.2 DA2.4
  Bottom Layer w0.2: v1(-13.825,-7.975) -13.825,-2.901 -11.516,-0.592 -11.516,3.596 -9.112,6 3.242,6 6.158,3.084 DA1.4
NetC6_1: C6.1 R4.1 | length 3.3
  Top Layer w0.2: C6.1 5.2,2.171 5.284,2.255 7.229,2.255 7.37,2.114 7.37,2.089 7.67,1.789 R4.1
NetD1_1: D1.1 DD3.6 FU2.1 R12.1 VD2.2 | length 22
  Top Layer w0.2: v1(-8,4.9) D1.1 -7,5.55 FU2.1
  Bottom Layer w0.2: v1(-8,4.9) -10.5,2.4 -10.5,-1.475 R12.1 -9.675,-3.35 -9.4,-3.625 -9.4,-4.675 -9.25,-4.825 -9,-4.825 -8.725,-5.1 -4.925,-5.1 -4.375,-5.65 DD3.6@-4.375,-6.5
NetD1_2: D1.2 DD3.7 FU1.1 R12.2 VD2.1 | length 25.1
  Top Layer w0.2: FU1.1 -13.75,7.3 -11.82,7.3 -10.67,6.15 -10.67,4.92 D1.2 -10.64,4.89 v1(-8.957,4.89)
  Bottom Layer w0.2: v1(-8.957,4.89) -11.025,2.821 -11.025,-2.2 R12.2 -11.125,-3.45 -11.3,-3.625 -11.3,-4.675 -11.15,-4.825 -10.625,-4.825 -9.9,-5.55 -5.125,-5.55 -5.025,-5.65 DD3.7@-5.025,-6.5
NetDA3_1: DA3.1 R5.2 R6.1 | length 10.5
  Top Layer w0.2: R6.1 2.616,-4.225 4.141,-5.75 5.214,-5.75 7.25,-3.714 DA3.1 6.625,-2.6 6.3,-2.925 R5.2
NetDA3_3: DA3.3 DD1.1 | length 2
  Top Layer w0.2: DA3.3 DD1.1
NetDA3_4: DA3.4 R4.2 R5.1 | length 6.8
  Top Layer w0.2: R5.1 6.516,-1.475 6.641,-1.6 8.826,-1.6 9.15,-1.276 DA3.4 9.145,0.005 R4.2 ; R5.1@5.8,-1.575 R5.1@5.825,-1.6
NetDD2_1: DD2.1 R14.2 | length 29.4
  Top Layer w0.2: v1(-9.8,1.5) -9.4,1.1 -9.4,0.725 DD2.1 ; v1(14.4,0.1) 14.8,0.5 15.875,0.5 R14.2
  Signal Layer 1 w0.3: v1(-9.8,1.5) -8.9,0.6 2.453,0.6 5.305,-2.252 12.048,-2.252 v1(14.4,0.1)
NetDD2_16: DD2.16 R9.2 | length 1.8
  Top Layer w0.2: DD2.16 -3.175,-1.8 R9.2
NetDD4_3: DD4.3 R16.2 | length 2.4
  Top Layer w0.2: DD4.3 3.654,3.35 3.8,3.204 R16.2
NetDD5_3: DD5.3 R17.1 R21.2 VD4.1 | length 5.1
  Bottom Layer w0.2: VD4.1 R17.1@7.865,-3.84 ; R17.1 R17.1@7.865,-3.84 ; R21.2 7.9,-3.162 ; DD5.3 8.835,-3.065 8.7,-3.2 7.938,-3.2 7.9,-3.162 ; R17.1@7.865,-3.84 7.9,-3.805 7.9,-3.162
NetR21_1: R21.1 VD5.1 XS5.1 | length 14.6
  Signal Layer 1 w0.3: v1(6.815,-1.031) 12.06,4.214 XS5.1
  Signal Layer 2 w0.3: v1@6.785,-1.031 v1(6.815,-1.031)
  Bottom Layer w0.2: VD5.1@4.373,-2.3 4.373,-1.442 4.784,-1.031 v1(6.815,-1.031) 7.861,-1.031 R21.1
NetR25_2: R25.2 XS4.6 | length 5.5
  Top Layer w0.2: R25.2 5.425,10.2 5.725,10.5 9.335,10.5 9.565,10.27 9.565,9.705 XS4.6
PULSE_NEG: DD2.27 R15.2 XS1.4 | length 42.6
  Top Layer w0.2: DD2.27 -8,2.3 v1(-8.6,2.9) -8.1,3.4 -4.3,3.4 -0.7,7 R15.2
  Signal Layer 2 w0.3: v1(-8.6,2.9) -8.6,-0.742 -1.142,-8.2 5.9,-8.2 8.22,-10.52 10,-10.52 XS1.4
PULSE_POS: DD2.22 XS1.6 | length 22.2
  Top Layer w0.2: DD2.22 -5.25,1.575 -4.625,2.2 v1(-4.625,2.691)
  Signal Layer 2 w0.3: v1(-4.625,2.691) -4.625,0.525 3.2,-7.3 6.1,-7.3 8.47,-9.67 XS1.6
REF1.5: C4.1 DD2.10 R2.2 | length 13.1
  Top Layer w0.2: DD2.10 -7.5,-3.966 -7.166,-4.3 -1.35,-4.3 -0.6,-3.55 C4.1 2.5,-2.746 2.646,-2.6 3.475,-2.6 R2.2
REF_P: C2.1 C6.2 DD1.7 R2.1 XS6.4 | length 29.9
  Top Layer w0.2: R2.1 3.5,-0.026 3.676,0.15 C6.2 5.2,0.754 5.054,0.9 4.7,0.9 4.5,1.1 4.5,2.454 4.646,2.6 10.412,2.6 10.529,2.483 10.529,-0.833 10.646,-0.95 11.658,-0.95 11.775,-0.833 DD1.7 11.775,1.224 12.026,1.475 12.774,1.475 12.95,1.651 C2.1 12.95,2.75 12.496,3.204 10.876,3.204 10.7,3.379 10.7,4.932 11.565,5.797 14.359,5.797 14.476,5.68 XS6.4
RST_PR: C14.1 R18.2 R20.1 XS5.3 | length 12.4
  Top Layer w0.2: R20.1 5.472,8.353 6.325,7.5 8.611,7.5 8.787,7.324 8.787,5.325 ; R18.2@8.049,5.3 8.074,5.325 8.149,5.325 8.787,5.325 ; C14.1 10.383,5.313 10.5,5.43 v1(10.5,5.9) ; C14.1@9.5,5.325 8.787,5.325
  Signal Layer 2 w0.3: v1(10.5,5.9) 13.19,5.9 13.33,6.04 XS5.3
RX: DD2.21 DD3.1 XS7.5 | length 30.4
  Top Layer w0.2: DD2.21 -3.5,0.7 v1(-2.058,2.142)
  Signal Layer 1 w0.3: XS7.5 -15.746,3.796 -16.596,4.646 -16.596,5.364 -15.06,6.9 -4.756,6.9 -2.058,4.202 v1(-2.058,2.142)
  Bottom Layer w0.2: DD3.1@-5.675,-2.7 -5.7,-2.675 -5.7,-0.6 -2.958,2.142 v1(-2.058,2.142)
SCK: DD1.4 DD2.17 DD5.6 XS7.1 | length 39.6
  Top Layer w0.2: DD2.17 -2.1,-1.3 -1.55,-1.85 v1(-0.945,-1.85) ; v1(13.075,-3.65) DD1.4
  Signal Layer 1 w0.3: XS7.1 -13.206,2.651 -8.705,-1.85 v1(-0.945,-1.85)
  Bottom Layer w0.2: v1(-0.945,-1.85) 0.725,-1.85 2.738,0.163 7.229,0.163 7.241,0.175 8.559,0.175 8.571,0.163 10.991,0.163 12.5,-1.346 13.075,-1.921 13.075,-3.065 ; v1(13.075,-3.65) 13.075,-3.065 ; DD5.6 13.075,-3.065
TD: DD2.26 R7.2 XS2.4 | length 26.1
  Top Layer w0.2: XS2.4 -10.85,-9.75 -10.155,-10.445 -8.645,-10.445 -8.3,-10.1 R7.2 ; v1(-7.772,2.85) -7.772,2.829 -7.5,2.556 DD2.26
  Signal Layer 2 w0.3: XS2.4 -10,-10.52 -9.228,-10.52 -8.373,-9.665 -8.373,-6.254 -9.525,-5.102 -9.525,-3.075 -10.5,-2.1 -10.5,3.425 -10.183,3.742 -8.046,3.742 -7.772,3.468 v1(-7.772,2.85)
TX: DD2.20 DD3.4 XS7.6 | length 25.6
  Top Layer w0.2: DD2.20 -3.2,0.2 v1(-2.1,1.3)
  Signal Layer 1 w0.3: XS7.6 -14.358,6.4 -4.963,6.4 -2.8,4.237 -2.8,1.476 -2.624,1.3 v1(-2.1,1.3)
  Bottom Layer w0.2: DD3.4@-3.725,-2.7 -3.725,-0.325 v1(-2.1,1.3)
VDD: C10.1 C11.1 DD2.6 VD1.2 | length 23.8
  Top Layer w0.2: v1(-13.5,-1.1) -12.985,-1.1 -12.809,-1.276 C11.1 C10.1 -11.266,-1.8 DD2.6 ; v1(1.491,-0.131) 1.897,-0.131 2.291,-0.525 VD1.2
  Signal Layer 1 w0.3: v1(-13.5,-1.1) -12.9,-1.1 -11,-3 0.4,-3 1.5,-1.9 1.5,-0.14 v1(1.491,-0.131)
pads on no net: DA1.1 DA1.3 DA2.1 DA2.3 DD2.3 DD2.4 DD4.5 XS1.1 XS1.3 XS1.5 XS2.3 XS2.5 XS3.3 XS3.4 XS3.6 XS4.1 XS4.2 XS4.3 XS4.5 XS6.1

## Polygon pours and split planes (outlines as drawn)
GND on Top Layer "GND_TOP" (solid, pour order 0): -17,11 17,11 17,-11 -17,-11
GND on Bottom Layer "GND_BOT" (solid, pour order 1): -17,11 17,11 17,-11 -17,-11
GND on Signal Layer 1 "GND_SL1" (solid, pour order 2): -17,11 17,11 17,-11 -17,-11
GND on Signal Layer 2 "GND_SL2" (solid, pour order 3): -17,11 17,11 17,-11 -17,-11

## Silkscreen, mask and mechanical layers (free items; w line width, h text height)
Top Overlay:
  text "плп-cm_2a" at -4.109,9.6 h1.5
  text "M" at -0.875,-10.7 h1.5
Bottom Overlay:
  lines w0.1: -10.075,-0.2 9.7,-0.2 ; -9.85,0.8 9.85,0.8 ; -3,0.8 3,0.8 3,10.125 -3,10.125 -3,0.8
  text "M" at -7.575,1.125 h1
  text "M" at 5.5,1 h1
Mechanical 1:
  circle w0.15: c4.8,-4.825 r1.149
  lines w0.15: -9.25,3.5 -9.25,6.75 ; -14.75,7.078 -13.5,7.078 -13.5,9.75 -14.75,9.75 -14.75,7.078 ; -12.9,-10.7 -8.9,-10.7 -8.9,-7.4 -12.9,-7.4 -12.9,-10.7 ; -12.7,7.4 -12.7,10.7 -8.7,10.7 -8.7,7.4 -12.7,7.4 ; -10.75,3.5 -10.75,6.5 -10.75,6.75 -6,6.75 -6,3.5 -10.75,3.5 ; -9.5,-3.075 -4.75,-3.075 -4.75,1.75 -9.5,1.75 -9.5,-3.075 ; -8.4,-6.55 -6.8,-6.55 -6.8,-4.65 -8.4,-4.65 -8.4,-6.55 ; -7.913,-8.672 -5.556,-8.672 -5.556,-7.584 -7.913,-7.584 -7.913,-8.672 ; -7.638,7.102 -7.638,9.773 -6.388,9.773 -6.388,7.102 -7.638,7.102 ; 6.3,7.4 6.3,10.7 10.3,10.7 10.3,7.4 6.3,7.4 ; 8.8,-10.7 8.8,-7.4 12.8,-7.4 12.8,-10.7 8.8,-10.7 ; 11.3,5.8 15.475,5.8 15.475,12.5 11.3,12.5 11.3,5.8
  lines w0.2: -8.9,1.245 cw(c-9,1.25) -8.9,1.25 ; -7,-6.205 cw(c-7.1,-6.2) -7,-6.2 ; 3.76,5.524 cw(c3.66,5.529) 3.76,5.529 ; 7.16,-1.876 cw(c7.06,-1.871) 7.16,-1.871 ; 11.022,-1.846 cw(c10.922,-1.841) 11.022,-1.841
  text "510" at 2.185,9.408 h0.5
  text "1K" at 2.688,8.111 h0.5
  text "100" at 1.553,6.739 h0.5
  text "1K" at 6.872,6.411 h0.5
  text "120pF" at 10.723,4.52 h0.5
  text "1K" at 6.6,4.4 h0.5
  text "0,1uF" at 8.238,2.942 h0.5
  text "4,7uF" at 12.5,2.667 h0.5
  text "120pF" at 4.347,1.919 h0.5
  text "30K" at 0.5,1.5 h0.5
  text "10K" at 7.972,0.611 h0.5
  text "0,1uF" at -12.675,0.15 h0.5 r90
  text "4,7uF" at -11.141,0.15 h0.5 r90
  text "100" at 15.2,-0.5 h0.5
  text "100" at 3.175,-0.8 h0.5
  text "910K" at 6.272,-3.064 h0.5
  text "0,1uF" at -9.7,-4.233 h0.5
  text "4,7uF" at -16.1,-4.333 h0.5
  text "5,96K" at -3.9,-4.433 h0.5
  text "4,7uF" at -10.467,-4.55 h0.5 r90
  text "0,1uF" at 8.4,-5.733 h0.5
  text "4,7uF" at 11.4,-5.733 h0.5
  text "510" at 1.3,-6 h0.5 r90
  text "48MHz" at -6,-6.45 h0.5 r90
  text "4,7uF" at 2.718,-7.777 h0.5 r90
  text "2,4K" at -5.456,-10.258 h0.5
  text "100" at -15.7,-10.425 h0.5
Mechanical 2:
  circle w0.2: c9.655,4.463 r0.1
  circle w0.4: c-5.75,-3.725 r0.1
  lines w0.15: 2.8,-2.8 2.8,-1.7 ; -11.8,-6.2 -8.8,-6.2 -8.8,-4.8 -11.8,-4.8 -11.8,-6.2 ; -6.2,-5.8 -3.2,-5.8 -3.2,-3.2 -6.2,-3.2 -6.2,-5.8 ; 2.6,-2.8 4.5,-2.8 4.5,-1.7 2.6,-1.7 2.6,-2.8
  text "4,7uF" at 10.3,0.867 h0.5
  text "120" at -9.8,-1.6 h0.5
  text "2,4K" at 7.2,-2.033 h0.5
  text "10K" at -6.8,-2.1 h0.5
  text "10K" at 8.5,-6.3 h0.5
  text "0,1uF" at 15.3,-8.333 h0.5
  text "0,1uF" at -3.8,-9.433 h0.5
Mechanical 3:
  lines w0.1: -3,-10.975 -3,0.025 ; 3,-11 3,0
Mechanical 4:
  lines w0.1: -17,-11 17,-11 17,11 -17,11 -17,-11